# Altium PCB QCopterMV-Camera_Pcb.PcbDoc
Units mil, origin at the board's own origin, x right, y up, seen from the top; angles counter-clockwise.
Board outline 1500 x 1500 mil, 2 copper layers (Top Layer, Bottom Layer), stack 46.457 mil thick; 24 components, 31 nets, 110 pads, 26 vias.
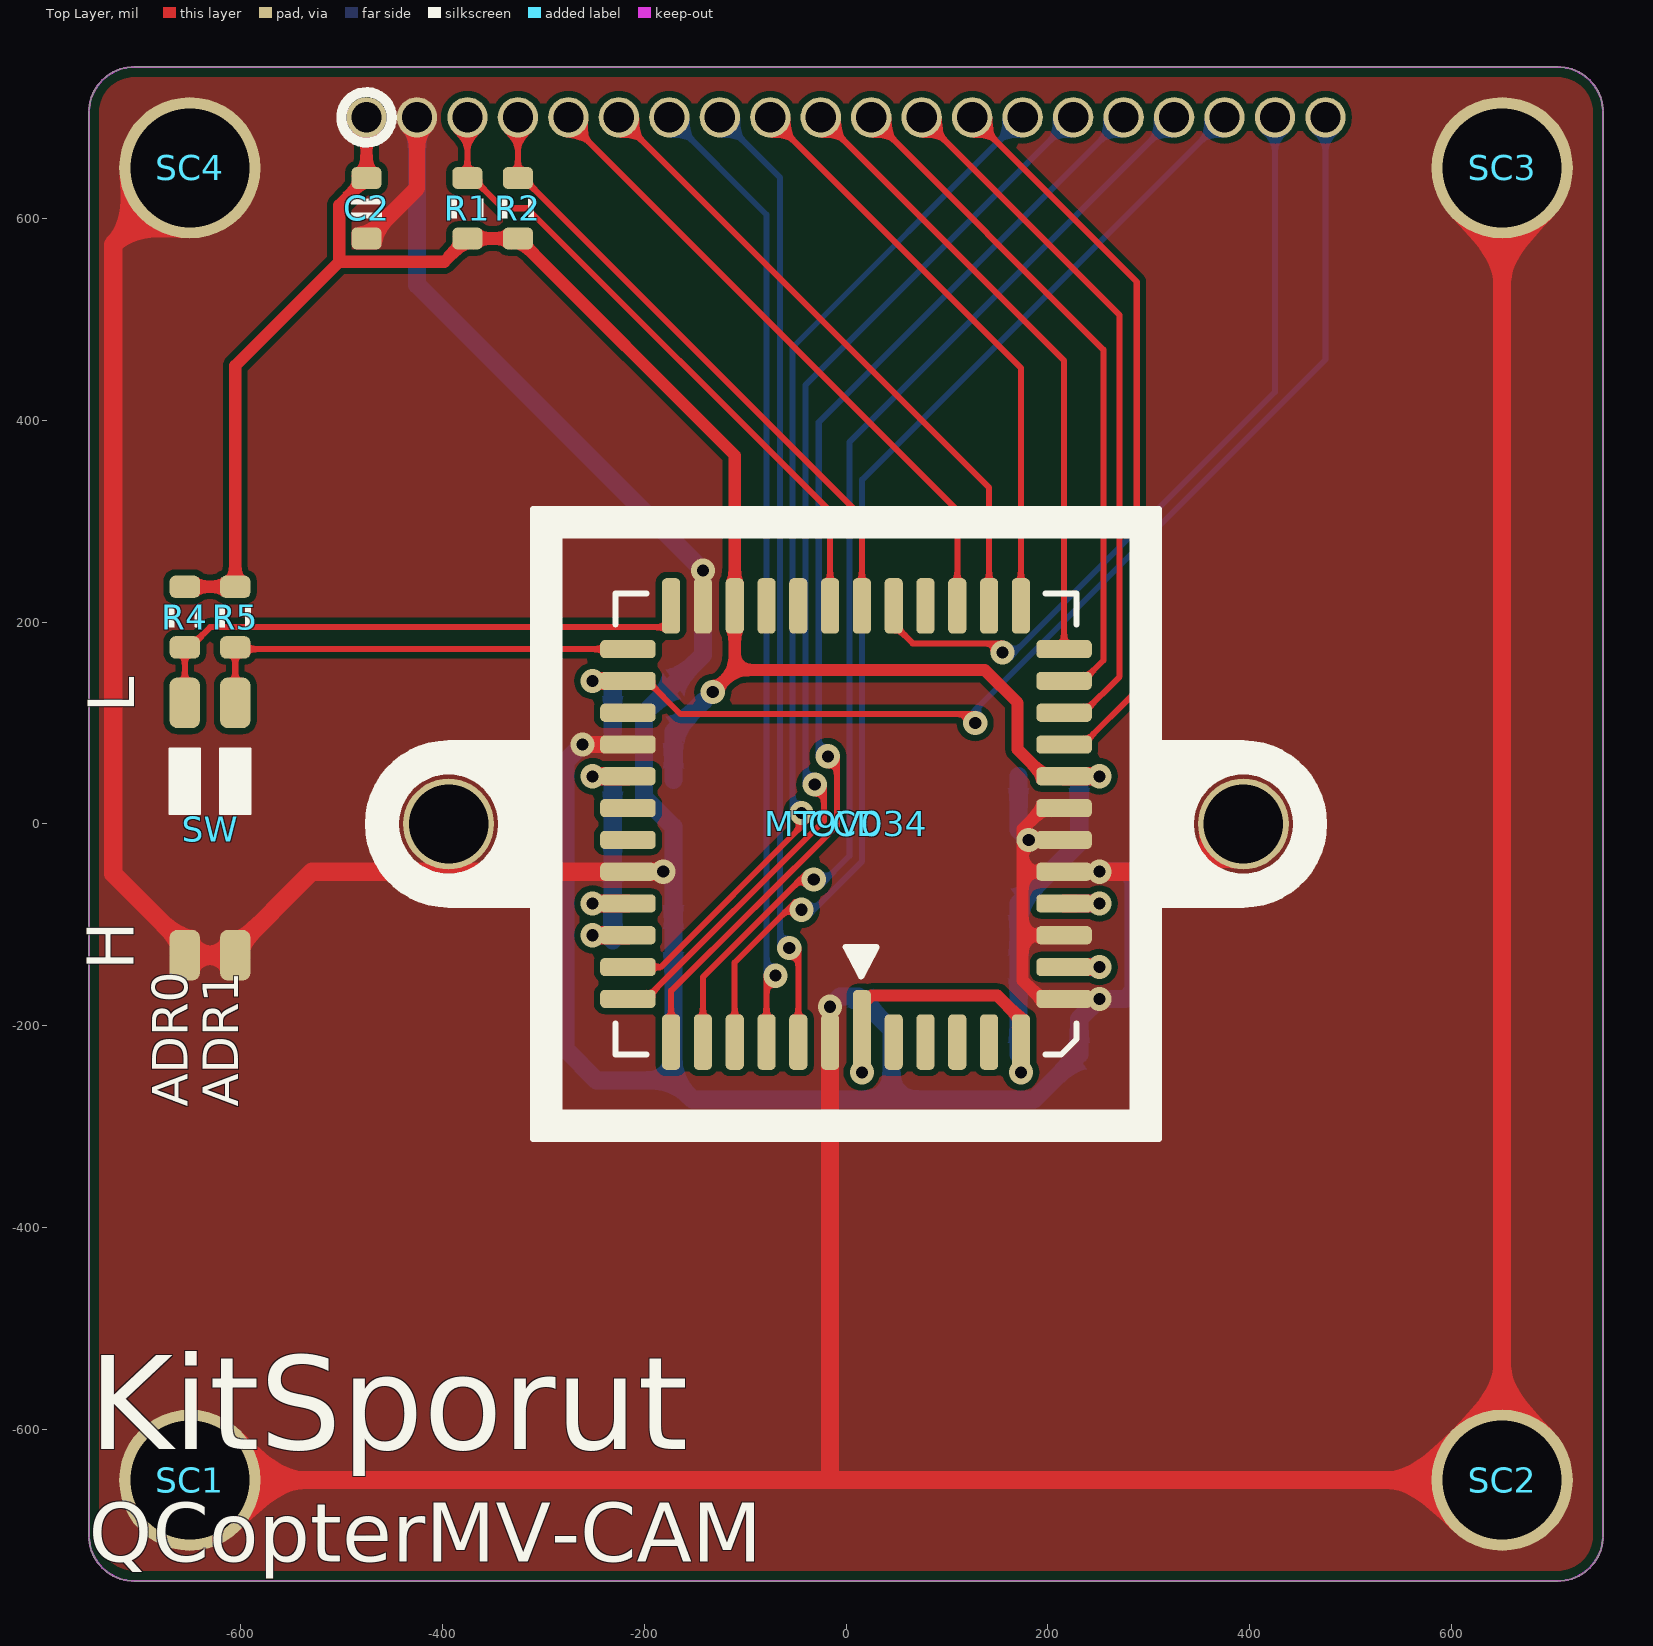
[diagram p0: Top Layer view]
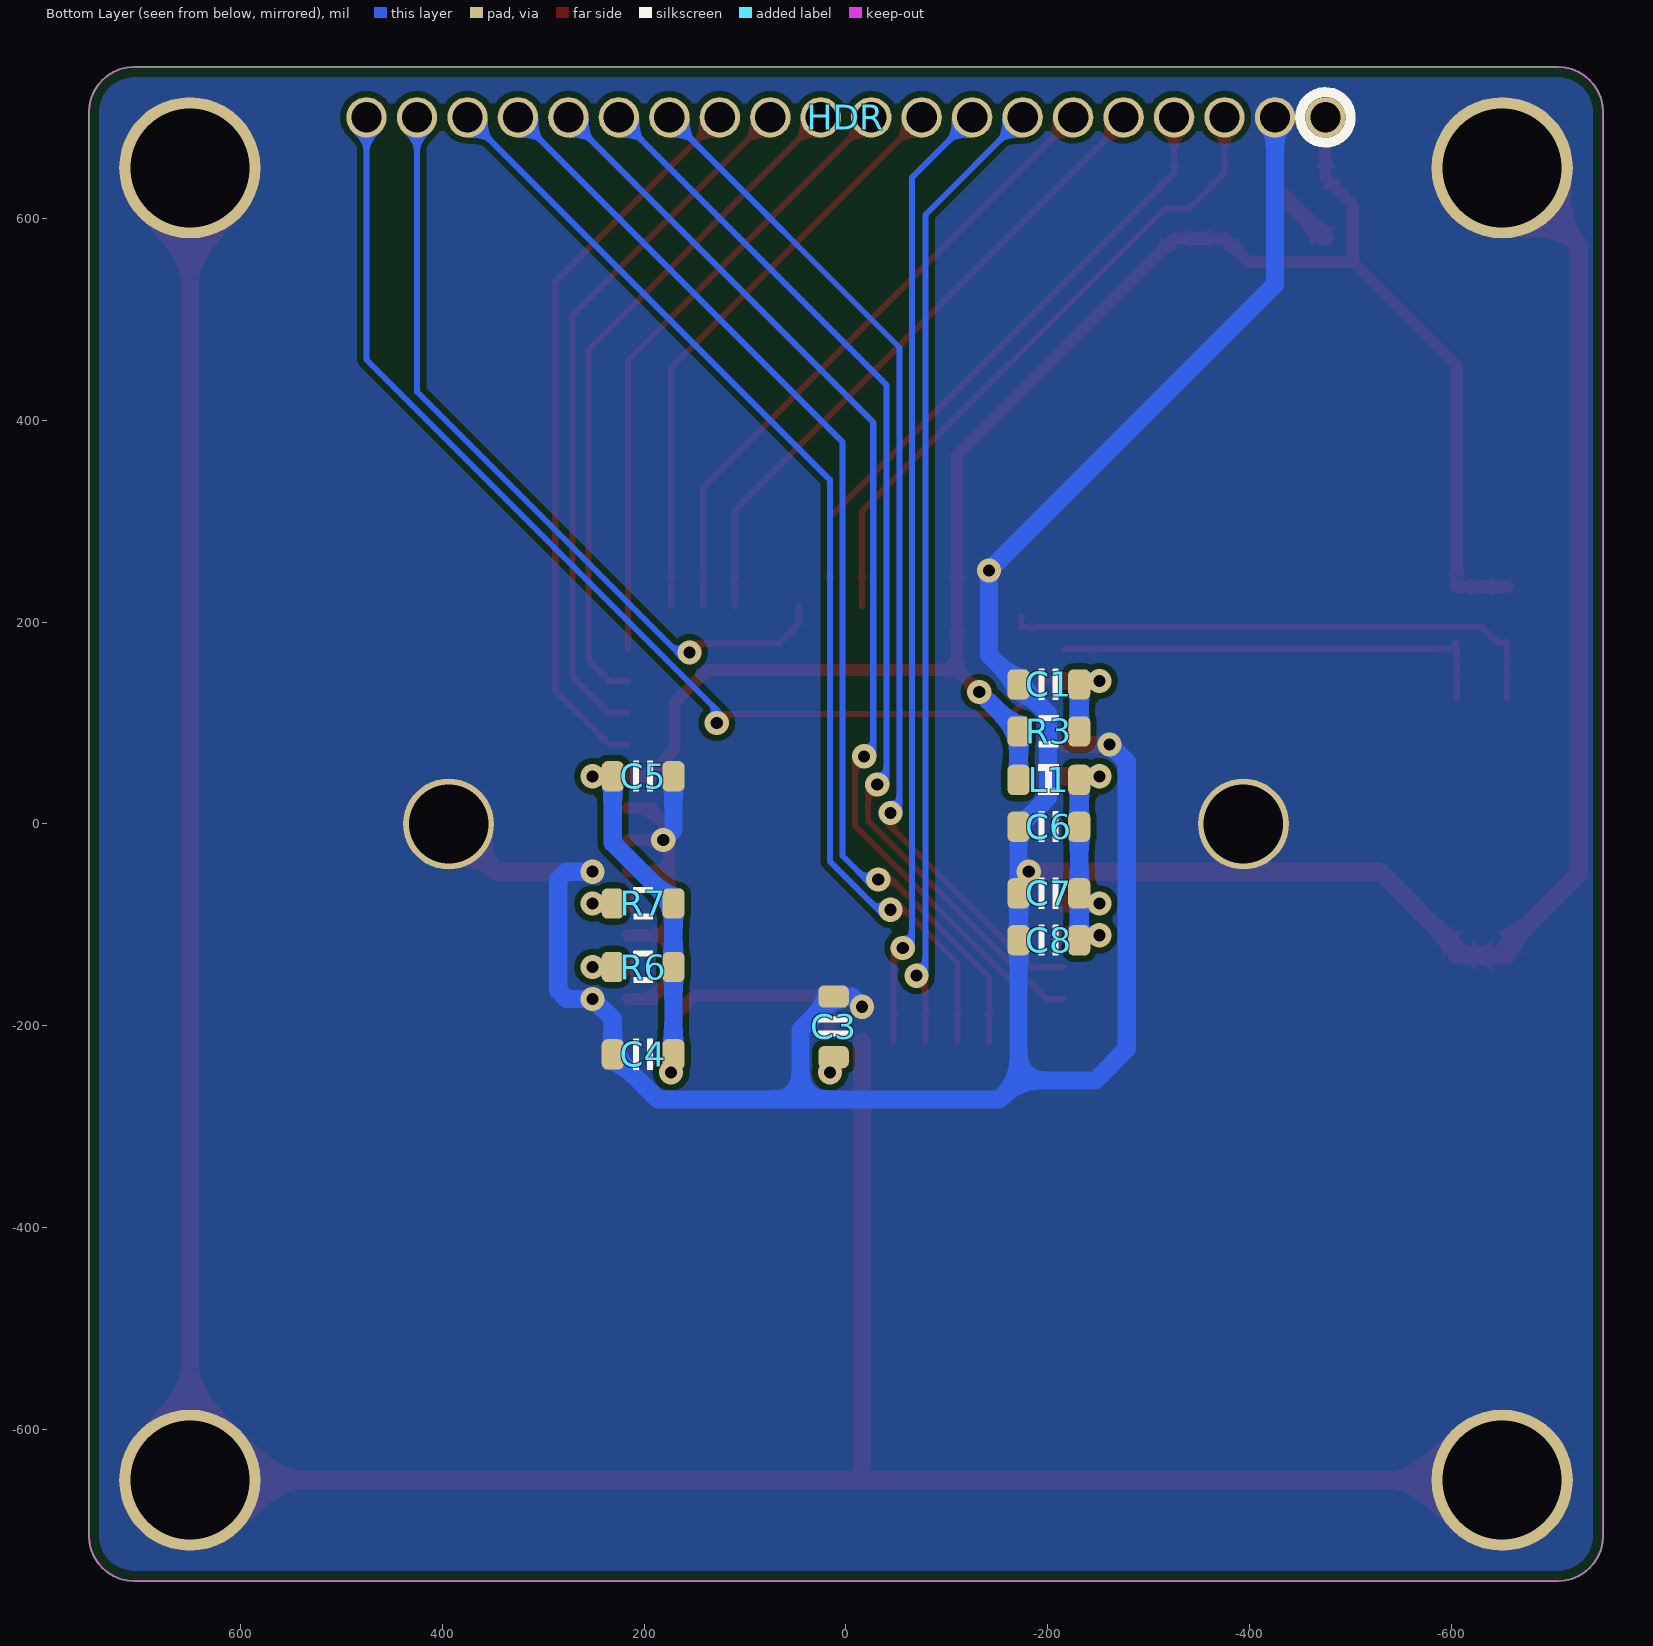
[diagram p1: Bottom Layer view, seen from below]
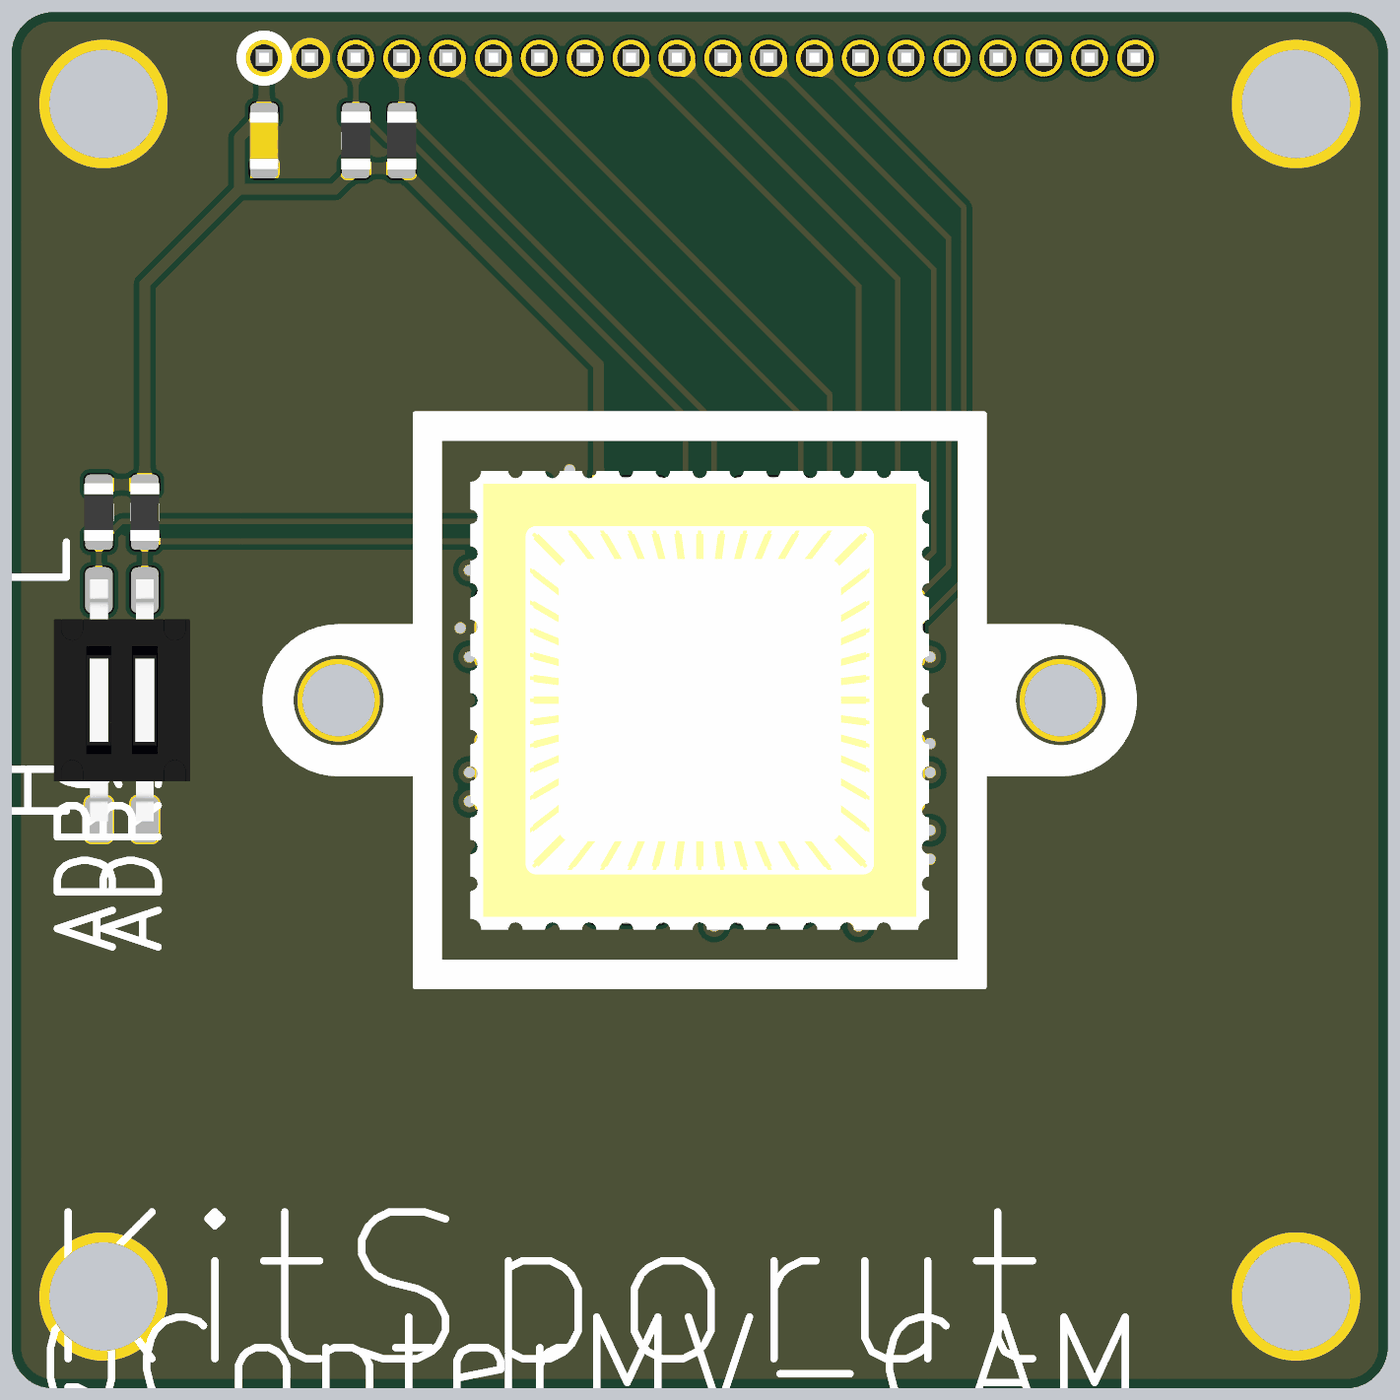
[diagram p2: 3D render of the assembled board from above, using the file's embedded part models]
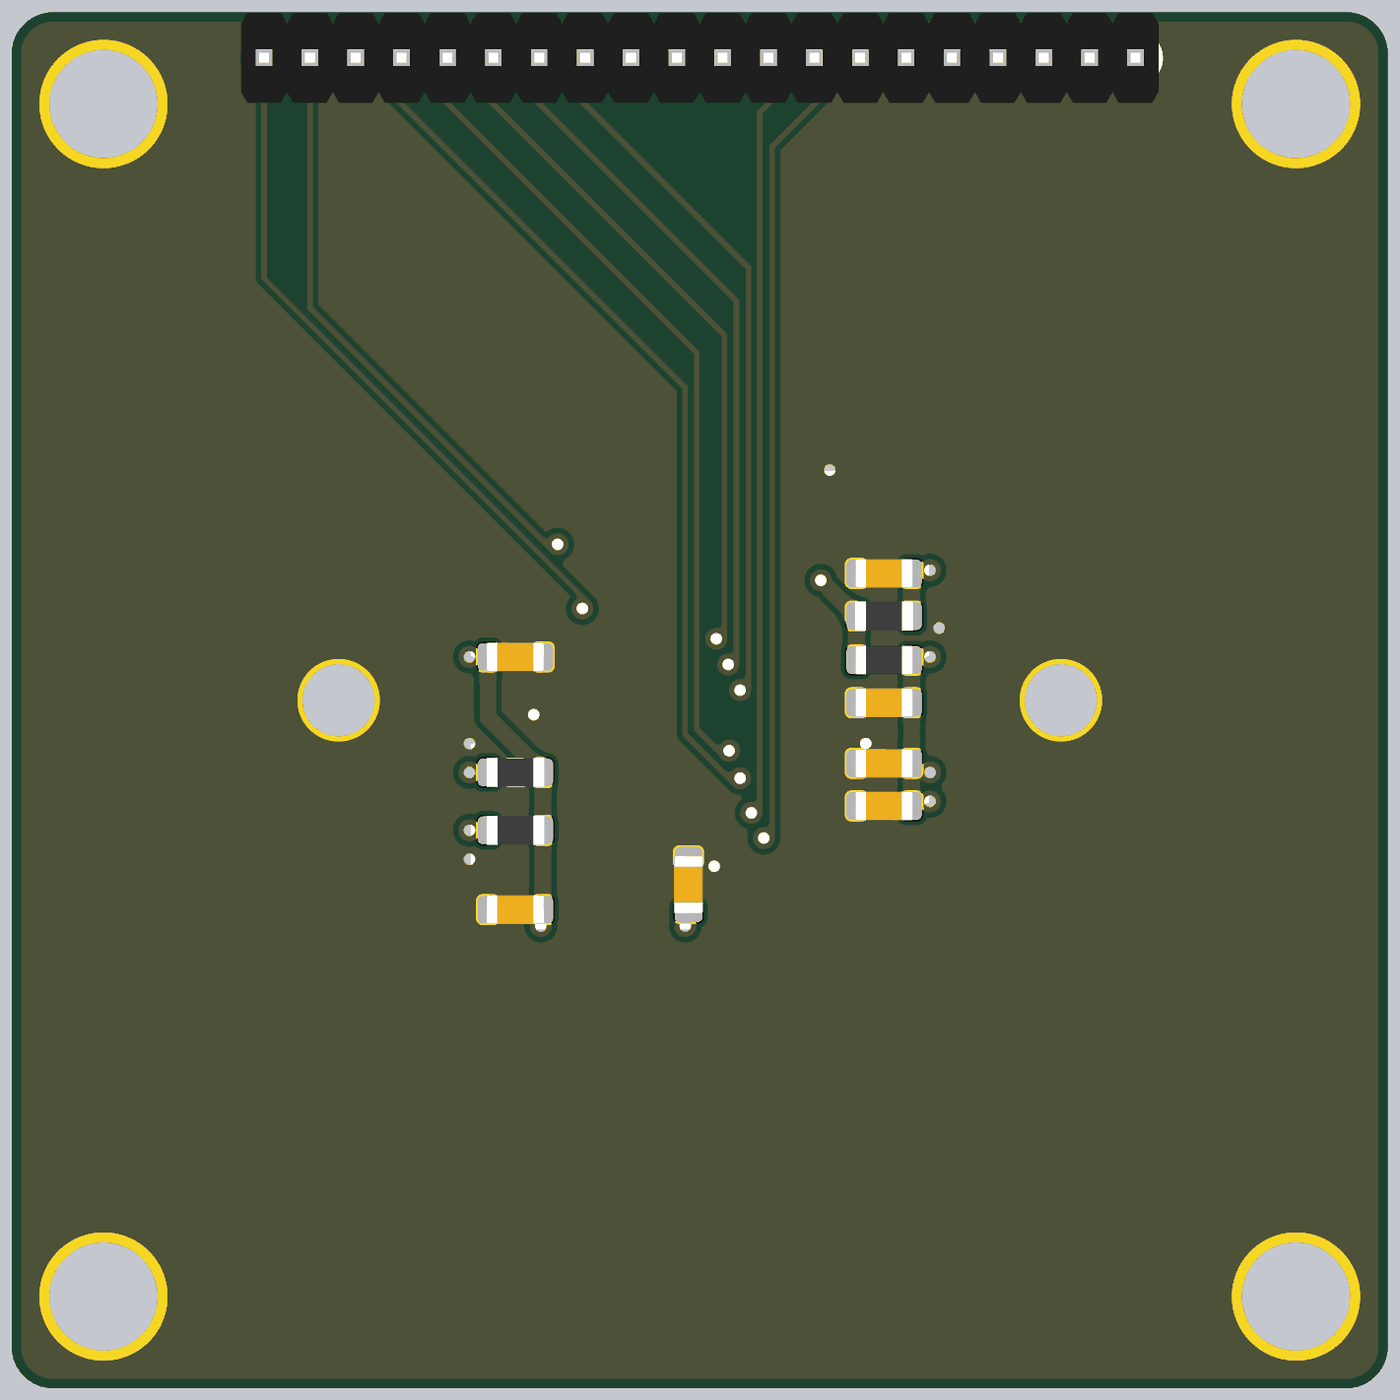
[diagram p3: 3D render of the assembled board from below, using the file's embedded part models]

## Layer stack, top to bottom
Top Solder: solder mask 0.3937, Solder Resist, Dk 3.5
Top Layer: signal copper 1.378
Dielectric1: dielectric 43.7008, FR-4, Dk 4.8
Bottom Layer: signal copper 1.378
Bottom Solder: solder mask 0.3937, Solder Resist, Dk 3.5

## Board outline
-750,-705 -750,705 cw(c-705,705) -705,750 705,750 cw(c705,705) 750,705 750,-705 cw(c705,-705) 705,-750 -705,-750 cw(c-705,-705)

## Design rules (kind name [scope] priority, off if disabled: settings)
BoardOutlineClearance [All] p1: gap=10 except(0: Arc-SplitContinuation Track-SplitContinuation SMDPad-SplitContinuation THPad-SplitContinuation Via-SplitContinuation Fill-SplitContinuation Poly-SplitContinuation Region-SplitContinuation Text-SplitContinuation)
Clearance ClearancePolygon [InPolygon] p1: gap=6
Clearance [All] p2: gap=6
ComponentClearance [All] p1: gap=0 collisioncheckmode=3 verticalgap=0 showdistances=FALSE
Height [All] p1: minheight=0 maxheight=5000 prefheight=500
HoleSize [All] p1: absolutevalues=TRUE maxlimit=200 minlimit=1 maxpercent=80.000 minpercent=20.000
HoleToHoleClearance [All] p1: gap=6 allowstackedmicrovias=TRUE
MinimumAnnularRing [All] p1: minimumring=5
MinimumSolderMaskSliver [All] p1: minsoldermaskwidth=0
PolygonConnect [All] p1: connectstyle=Direct reliefconductorwidth=10 reliefentries=4 polygonreliefangle="90 Angle" airgapwidth=10
RoutingVias [All] p1: holewidth=12 width=24 viastyle="Through Hole" minholewidth=12 minwidth=20 maxholewidth=28 maxwidth=50
SMDEntry [All] p1: side=TRUE corner=TRUE anyangle=FALSE
SilkToSilkClearance [All] p1: silktosilkclearance=0
SilkToSolderMaskClearance [IsPad] p1: minsilkscreentomaskgap=0 clearancetoexposedcopper=TRUE
SolderMaskExpansion [All] p1: expansion=2
Width [All] p1: maxlimit=100 minlimit=6 preferedwidth=10
23 further rules are at their usual default settings.

## Components (designator, comment, footprint, x,y, rotation, side; value= is the part's Value field where it differs from the comment)
C1 "Cap_0603" CAP_0603 -201,138.23 r180 bottom
C2 "Cap_0603" CAP_0603 -475,610 r90 top
C3 "Cap_0603" CAP_0603 12.24,-201 r270 bottom
C4 "Cap_0603" CAP_0603 201,-228.23 r180 bottom
C5 "Cap_0603" CAP_0603 201,47.24 r0 bottom
C6 "Cap_0603" CAP_0603 -201,-2.76 r180 bottom
C7 "Cap_0603" CAP_0603 -201,-68.74 r180 bottom
C8 "Cap_0603" CAP_0603 -201,-115.24 r180 bottom
CCD "CCD" CCD_LENS_20MM 0,0 r0 top locked
HDR "HDR1x20_1.27" HDR1X20_1.27_180 -475,700 r270 bottom
L1 "Ind_0603" IND_0603 -201,43.74 r180 bottom
MT9V034 "MT9V034" CLCC_48 0,0 r180 top locked
R1 "Res_0603" RES_0603 -375,610 r270 top
R2 "Res_0603" RES_0603 -325,610 r270 top
R3 "Res_0603" RES_0603 -201,91.73 r0 bottom
R4 "Res_0603" RES_0603 -655,205 r90 top
R5 "Res_0603" RES_0603 -605,205 r90 top
R6 "Res_0603" RES_0603 201,-141.73 r180 bottom
R7 "Res_0603" RES_0603 201,-78.74 r180 bottom
SC1 "M3" SCRREW_M3 -650,-650 r0 top locked
SC2 "M3" SCRREW_M3 650,-650 r0 top locked
SC3 "M3" SCRREW_M3 650,650 r180 top locked
SC4 "M3" SCRREW_M3 -650,650 r180 top locked
SW "SwitchSPST_2P" SwitchSPDT_P2_180 -630,-5 r0 top

## Footprints (in the part's own frame and the unit in brackets; to place one, negate y for a bottom-side part, rotate by r counter-clockwise, add the part's x,y. Pads: shape width x height; smd on the part's side, far side on the other; paste and mask are expansions set on the pad)
CAP_0603 [mil]
  rrect50% 22x30 smd: 1(-30,0) 2(30,0)
  silkscreen extent -10,-15 10,15, body extent -31,-16 31,16, height 31
CCD_LENS_20MM [mil]
  round 90 hole 78.74 mask+0: 0(-393.7,0) 0(393.7,0)
  silkscreen extent -474,-312 474,312
CLCC_48 [mil]
  rrect50% 18x79 smd: 1(-15.75,204)
  rrect50% 18x55 smd: 2(-47.24,216) 3(-78.74,216) 4(-110.24,216) 5(-141.73,216) 6(-173.23,216) 19(-173.23,-216) 20(-141.73,-216) 21(-110.24,-216) 22(-78.74,-216) 23(-47.24,-216) 24(-15.75,-216) 25(15.75,-216) 26(47.24,-216) 27(78.74,-216) 28(110.24,-216) 29(141.73,-216) 30(173.23,-216) 43(173.23,216) 44(141.73,216) 45(110.24,216) 46(78.74,216) 47(47.24,216) 48(15.75,216)
  rrect50% 55x18 smd: 7(-216,173.23) 8(-216,141.73) 9(-216,110.24) 10(-216,78.74) 11(-216,47.24) 12(-216,15.75) 13(-216,-15.75) 14(-216,-47.24) 15(-216,-78.74) 16(-216,-110.24) 17(-216,-141.73) 18(-216,-173.23) 31(216,-173.23) 32(216,-141.73) 33(216,-110.24) 34(216,-78.74) 35(216,-47.24) 36(216,-15.75) 37(216,15.75) 38(216,47.24) 39(216,78.74) 40(216,110.24) 41(216,141.73) 42(216,173.23)
  silkscreen extent -228,-228 228,228, body extent -250,-250 250,250, height 80
HDR1X20_1.27_180 [mil]
  round 40 hole 30: 1(0,0) 2(0,-50) 3(0,-100) 4(0,-150) 5(0,-200) 6(0,-250) 7(0,-300) 8(0,-350) 9(0,-400) 10(0,-450) 11(0,-500) 12(0,-550) 13(0,-600) 14(0,-650) 15(0,-700) 16(0,-750) 17(0,-800) 18(0,-850) 19(-0.01,-900) 20(-0.01,-950)
  body extent -50,-975 49,25, height 210
IND_0603 [mil]
  rrect50% 22x30 smd: 1(-30,0) 2(30,0)
  silkscreen extent -10,-15 10,15, body extent -31,-16 31,16, height 31
RES_0603 [mil]
  rrect50% 22x30 smd: 1(-30,0) 2(30,0)
  silkscreen extent -10,-16 10,16, body extent -31,-16 31,16, height 18
SCRREW_M3 [mil]
  round 140 hole 118 mask+0: 0(0,0)
SwitchSPDT_P2_180 [mil]
  rrect50% 30x50 smd: 1(-25,-125) 1ON(-25,125) 2(25,-125) 2ON(25,125)
  silkscreen extent -40,15 40,80, body extent -74,-127 74,137, height 59

## Part data
C1 C2 C3 C4 C5 C6 C7 C8: "Capacitor"
CCD: library part lensCCD_20
HDR: "Header"
L1: "Inductor"
MT9V034: "CMOS"
R1 R2 R3 R4 R5 R6 R7: "Resistor"
SC1 SC2 SC3 SC4: library part Screw_M3, "Screw"
SW: "Switch"

## Via types
v1: diameter 24, hole 12, Top Layer to Bottom Layer, 26 vias

## Nets (pads, with @x,y where several pads share a name; then routed paths per layer and width w, separated by ;. In a path a pad name is that pad's centre, name@x,y a point inside that pad or via, vN(x,y) a via of type N, cw(c..) or ccw(c..) an arc to the next point about the centre after c; other vN are vias at no path point)
3V3: C2.2 C3.2 C4.2 C5.2 HDR.1 L1.1 MT9V034.1 MT9V034.6 MT9V034.14 MT9V034.28 R1.2 R2.2 R3.2 R4.2 R5.2 R6.2 R7.2 | length 2363.6
  Top Layer w12: R4.2 R5.2 -605,454 -502,557 ; HDR.1 C2.2 -502,613 -502,557 ; v1(-132,130.73) -110.24,152.5 ; MT9V034.1 15.75,-179.25 25,-170 150,-170 173.23,-193.23 MT9V034.6 ; MT9V034.14 196.66,47.24 170,73.91 170,120 137.5,152.5 -110.24,152.5 ; -502,557 -398,557 R1.2 R2.2 -110.24,365.24 MT9V034.28 -110.24,152.5
  Top Layer w18: MT9V034.14 v1(251,47.24)
  Bottom Layer w18: L1.1 R3.2 -141,121.73 ; C4.2 R6.2 R7.2 231,-18.74 C5.2 v1(251,47.24)
  other v1: 15.75,-246 173.23,-246
3V3A: C6.2 C7.2 C8.2 L1.2 MT9V034.35 MT9V034.39 MT9V034.40 | length 324
  Top Layer w18: v1(-251,-110.24) MT9V034.40 ; v1(-251,-78.74) MT9V034.39 ; v1(-251,47.24) MT9V034.35
  Bottom Layer w18: v1(-251,-110.24) C8.2@-231,-110.24 ; v1(-251,-78.74) C7.2@-231,-78.74 ; v1(-251,47.24) L1.2@-231,47.24 ; C8.2 C7.2 C6.2 L1.2
ADR0: MT9V034.30 R4.1 SW.1ON | length 554
  Top Layer w6: SW.1ON@-655,125 R4.1 -655,180 -645,180 -630,195 -173.23,195 MT9V034.30@-173.23,206
ADR1: MT9V034.31 R5.1 SW.2ON | length 441.8
  Top Layer w6: SW.2ON@-605,125 R5.1 ; R5.1@-605,180 -598.23,173.23 MT9V034.31
COUT_N: MT9V034.2
COUT_P: MT9V034.3
D0: HDR.18 MT9V034.45 | length 1125.3
  Top Layer w6: MT9V034.45 -110.24,-137.21 v1@-50.51,-77.49
  Bottom Layer w6: v1@-38,-91 16,-37 16,341 HDR.18
  other v1: -44,-85
D1: HDR.17 MT9V034.44 | length 1117.5
  Top Layer w6: MT9V034.44 -141.73,-151.73 v1@-38.5,-48.5
  Bottom Layer w6: v1@-26.59,-61.56 3.25,-31.72 3.25,378.25 HDR.17
  other v1: -32,-55
D2: HDR.16 MT9V034.43 | length 1109.4
  Top Layer w6: MT9V034.43 -173.23,-165.2 -9,-1.97 v1@-9,67
  Bottom Layer w6: v1@-27.01,67.01 -27.01,397.99 HDR.16
  other v1: -18.01,67.01
D3: HDR.15 MT9V034.42 | length 1073.8
  Top Layer w6: MT9V034.42 -198.23,-173.23 -22,3 v1@-22,39
  Bottom Layer w6: v1@-40,39 -40,435 HDR.15
  other v1: -31,39
D4: HDR.14 MT9V034.41 | length 1021.1
  Top Layer w6: MT9V034.41 -183.7,-141.73 v1@-38.49,3.49
  Bottom Layer w6: v1@-52.99,10.99 -52.99,472.02 HDR.14
  other v1: -43.99,10.99
D5: HDR.13 MT9V034.15 | length 729.6
  Top Layer w6: HDR.13 288,537 288,132 234.74,78.74 MT9V034.15
D6: HDR.12 MT9V034.16 | length 705
  Top Layer w6: HDR.12 271,504 271,146 235.24,110.24 MT9V034.16
D7: HDR.11 MT9V034.17 | length 680.7
  Top Layer w6: HDR.11 255,470 255,162 234.73,141.73 MT9V034.17
D8: HDR.10 MT9V034.18 | length 626.6
  Top Layer w6: HDR.10 216,459 MT9V034.18
D9: HDR.9 MT9V034.19 | length 586.8
  Top Layer w6: HDR.9 173.23,451.77 MT9V034.19
DOUT_N: MT9V034.5
DOUT_P: MT9V034.4
EXP: HDR.19 MT9V034.23 | length 779.1
  Top Layer w6: MT9V034.23 47.24,197.76 66,179 v1@155,179
  Bottom Layer w6: v1@161,164 425,428 HDR.19
  other v1: 155,170
GND: C1.1 C2.1 C3.1 C4.1 C5.1 C6.1 C7.1 C8.1 CCD.0 HDR.2 MT9V034.7 MT9V034.9 MT9V034.11 MT9V034.12 MT9V034.13 MT9V034.29 MT9V034.34 MT9V034.38 MT9V034.48 SC1.0 SC2.0 SC3.0 SC4.0 SW.1 SW.2 | length 7545
  Top Layer w12: MT9V034.7 193.23,-173.23 175,-155 175,-110.24 ; MT9V034.9 175,-110.24 ; MT9V034.11 175,-47.24 ; MT9V034.12 v1(181,-15.75) v1@175,-15.75 ; MT9V034.13 195.75,15.75 175,-5 v1@175,-15.75 ; 175,-110.24 175,-47.24 ; 175,-47.24 v1@175,-15.75
  Top Layer w16: C2.1 -425,630 HDR.2 ; v1(-261,78.74) MT9V034.34
  Top Layer w18: SC1.0 -13.63,-650 ; SC4.0 -725.84,574.16 -725.84,-49.29 -655,-120.14 SW.1 SW.2 ; SW.2@-607.26,-125.66 -528.85,-47.24 MT9V034.38 v1(-181,-47.24) ; MT9V034.48 -15.75,-647.88 -13.63,-650 ; v1(251,-47.24) 346.46,-47.24 CCD.0@393.7,0 ; SC3.0 SC2.0 -13.63,-650
  Bottom Layer w18: HDR.2 -425,534.27 v1(-141.73,251) -141.73,167.5 C1.1 -200,109.23 -200,26.24 C6.1 C7.1@-171,-57.24 ; v1(-261,78.74) -278.07,61.67 -278.07,-222.91 -246.99,-254 -171,-254 ; v1(-181,-47.24) C7.1@-171,-57.24 ; v1(-15.75,-181) -5.75,-171 C3.1 45,-203.76 45,-273 ; C5.1 171,-5.75 v1(181,-15.75) ; v1(251,-47.24) 277.24,-47.24 285,-55 285,-165 276.77,-173.23 v1(251,-173.23) 231,-193.23 C4.1 186.23,-273 45,-273 ; -171,-254 C8.1 C7.1 C7.1@-171,-57.24 ; -171,-254 -152,-273 45,-273
HSYNC: HDR.6 MT9V034.20 | length 635.9
  Top Layer w6: HDR.6 141.73,333.27 MT9V034.20
LED: MT9V034.27
NetMT9V034_8: MT9V034.8 R6.1 | length 55
  Top Layer w18: MT9V034.8 v1(251,-141.73)
  Bottom Layer w18: R6.1 v1(251,-141.73)
NetMT9V034_10: MT9V034.10 R7.1 | length 55
  Top Layer w18: MT9V034.10 v1(251,-78.74)
  Bottom Layer w18: R7.1 v1(251,-78.74)
PCLK: HDR.7 MT9V034.46 | length 956.1
  Top Layer w6: MT9V034.46 v1@-78.74,-150
  Bottom Layer w6: HDR.7 -78.74,603.74 v1@-78.74,-150.26
  other v1: -69.74,-150.26
RST: C1.2 HDR.20 MT9V034.32 R3.1 | length 1198.3
  Top Layer w6: MT9V034.32 -196.73,141.73 -164,109 v1@128,109
  Top Layer w18: v1(-251,141.73) MT9V034.32
  Bottom Layer w6: v1@122,107 475,460 HDR.20
  Bottom Layer w18: v1(-251,141.73) C1.2@-231,141.73 ; R3.1 C1.2
  other v1: 128,100
SCL: HDR.3 MT9V034.25 R1.1 | length 646.9
  Top Layer w6: HDR.3 -375,645 -340,610 -316,610 -15.75,309.75 MT9V034.25
SDA: HDR.4 MT9V034.24 R2.1 | length 625.1
  Top Layer w6: HDR.4 -325,645 15.75,304.25 MT9V034.24
STB: MT9V034.33
VSYNC: HDR.5 MT9V034.21 | length 643.6
  Top Layer w6: HDR.5 -275,696.06 110.24,310.82 MT9V034.21
XCLK: HDR.8 MT9V034.47 | length 940.8
  Top Layer w6: MT9V034.47 v1@-47.24,-122.76
  Bottom Layer w6: HDR.8 -65.24,640.25 v1@-65.24,-122.76
  other v1: -56.24,-122.76
pads on no net: MT9V034.22 MT9V034.26 MT9V034.36 MT9V034.37

## Polygon pours and split planes (outlines as drawn)
no net on Keep-Out Layer "keepout" (none, remove dead copper): -750,-705 -750,705 cw(c-705,705) -705,750 705,750 cw(c705,705) 750,705 750,-705 cw(c705,-705) 705,-750 -705,-750 cw(c-705,-705)
GND on Top Layer "GND_L01_P002" (solid, remove dead copper, pour order 2): -750,-705 -750,705 cw(c-705,705) -705,750 705,750 cw(c705,705) 750,705 750,-705 cw(c705,-705) 705,-750 -705,-750 cw(c-705,-705)
GND on Bottom Layer "GND_L02_P003" (solid, remove dead copper, pour order 3): -750,-705 -750,705 cw(c-705,705) -705,750 705,750 cw(c705,705) 750,705 750,-705 cw(c705,-705) 705,-750 -705,-750 cw(c-705,-705)

## Silkscreen, mask and mechanical layers (free items; w line width, h text height)
Top Overlay:
  circle w10: c-475,700 r25
  text "L" at -690,110 h80 r90
  text "H" at -690,-145 h80 r90
  text "ADR0" at -640,-280 h60 r90
  text "ADR1" at -590,-280 h60 r90
  text "KitSporut" at -750,-650 h160
  text "QCopterMV-CAM" at -750,-750 h100
Bottom Overlay:
  circle w10: c-475,700 r25
Mechanical 1:
  the board outline again, w2